# Altium PCB shayan_droudian.PcbDoc
Units mm, origin at the board's own origin, x right, y up, seen from the top; angles counter-clockwise.
Board outline 98.05 x 62.87 mm, 2 copper layers (Top Layer, Bottom Layer); 28 components, 23 nets, 116 pads, 8 vias.
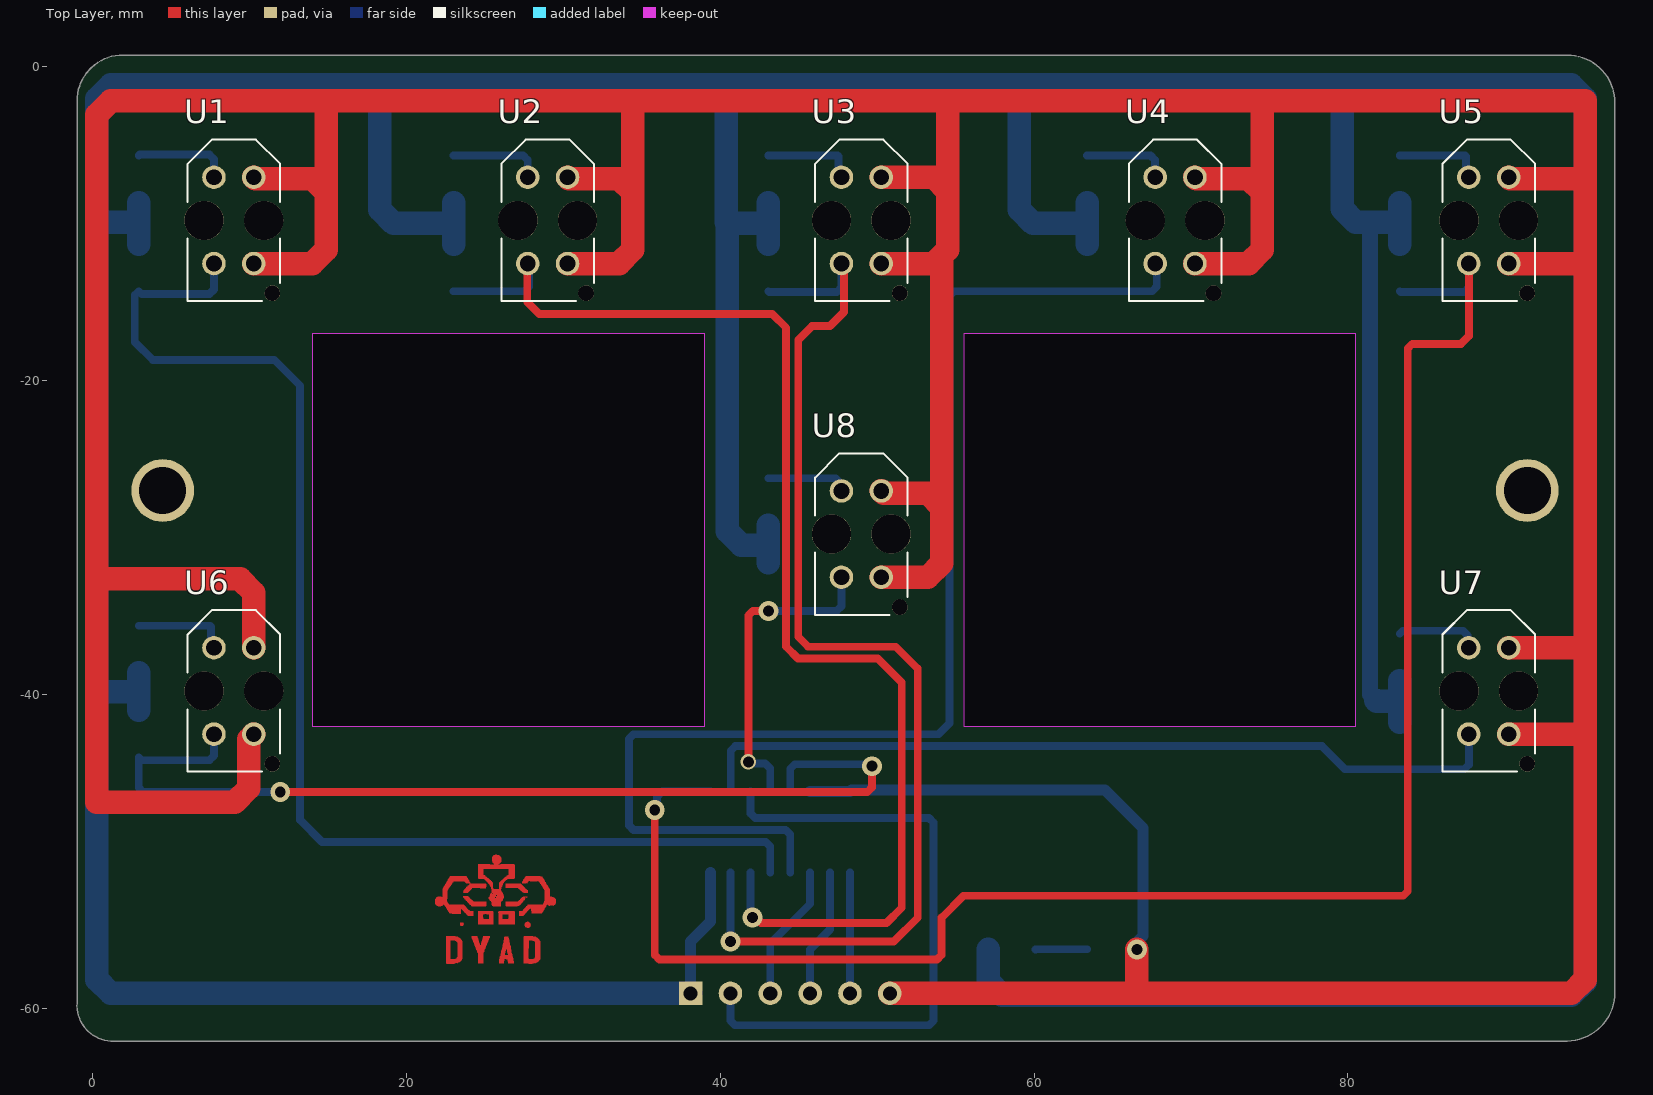
[diagram p0: Top Layer view]
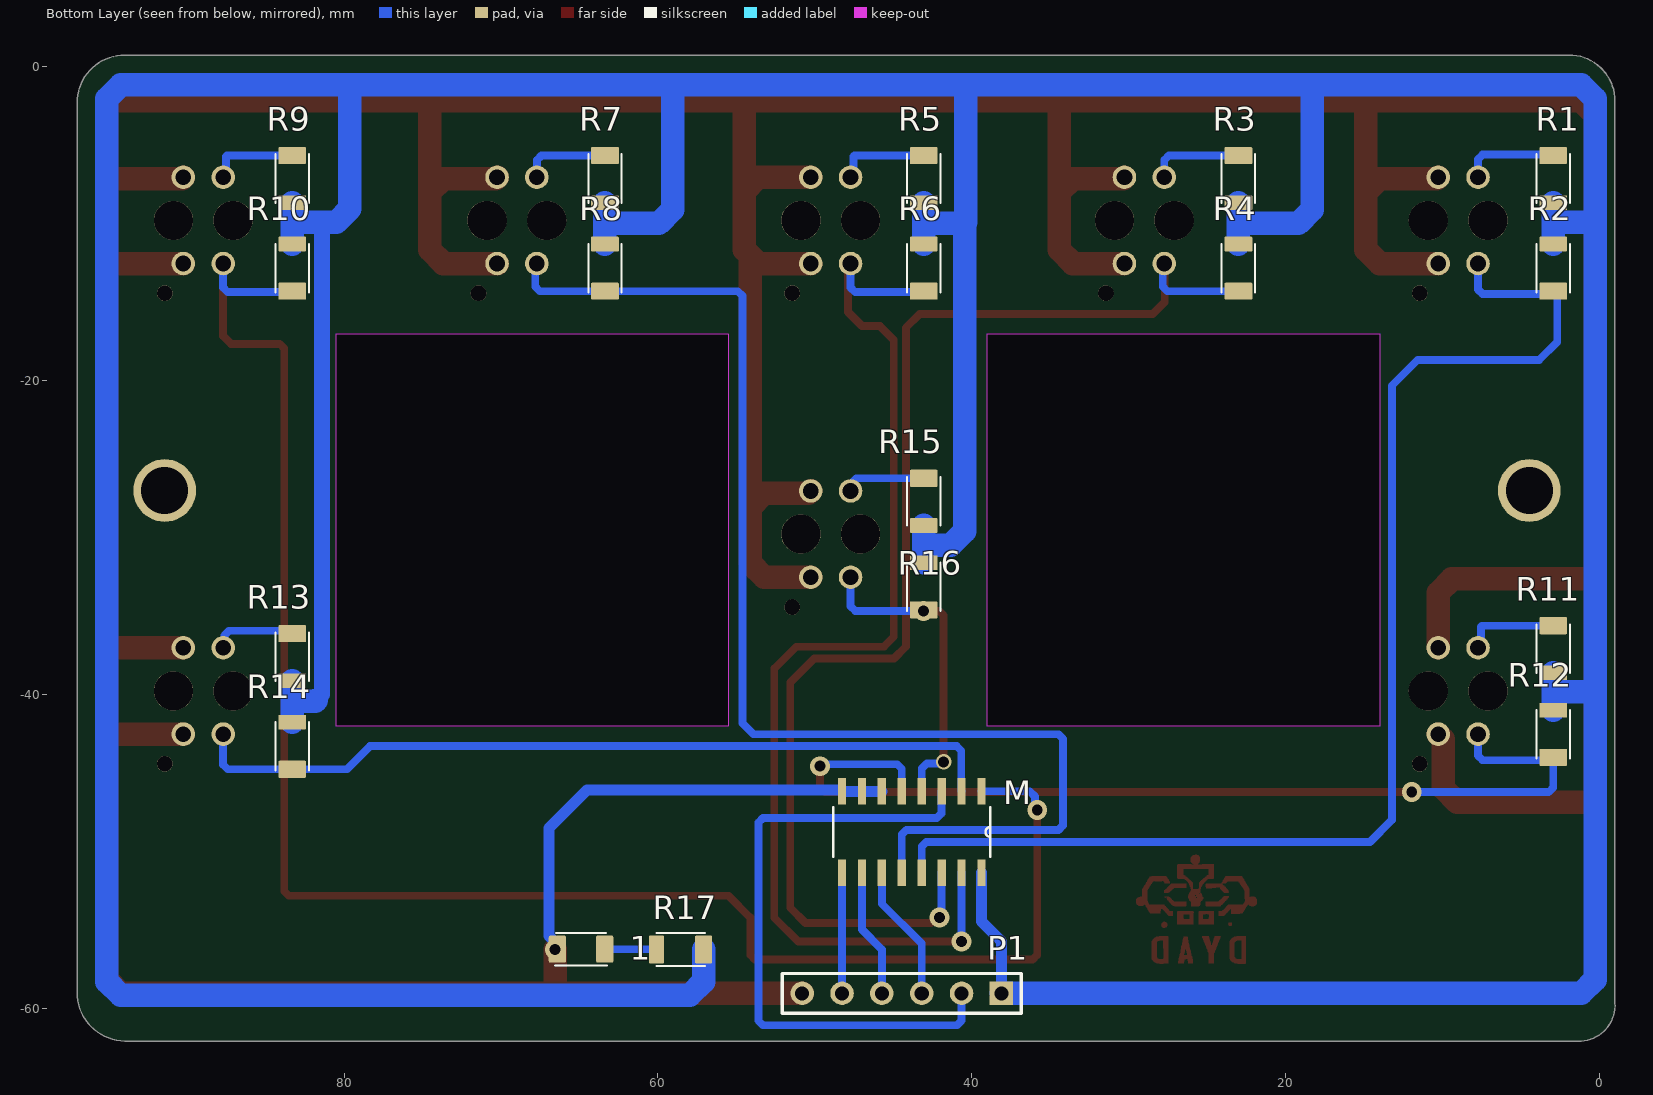
[diagram p1: Bottom Layer view, seen from below]
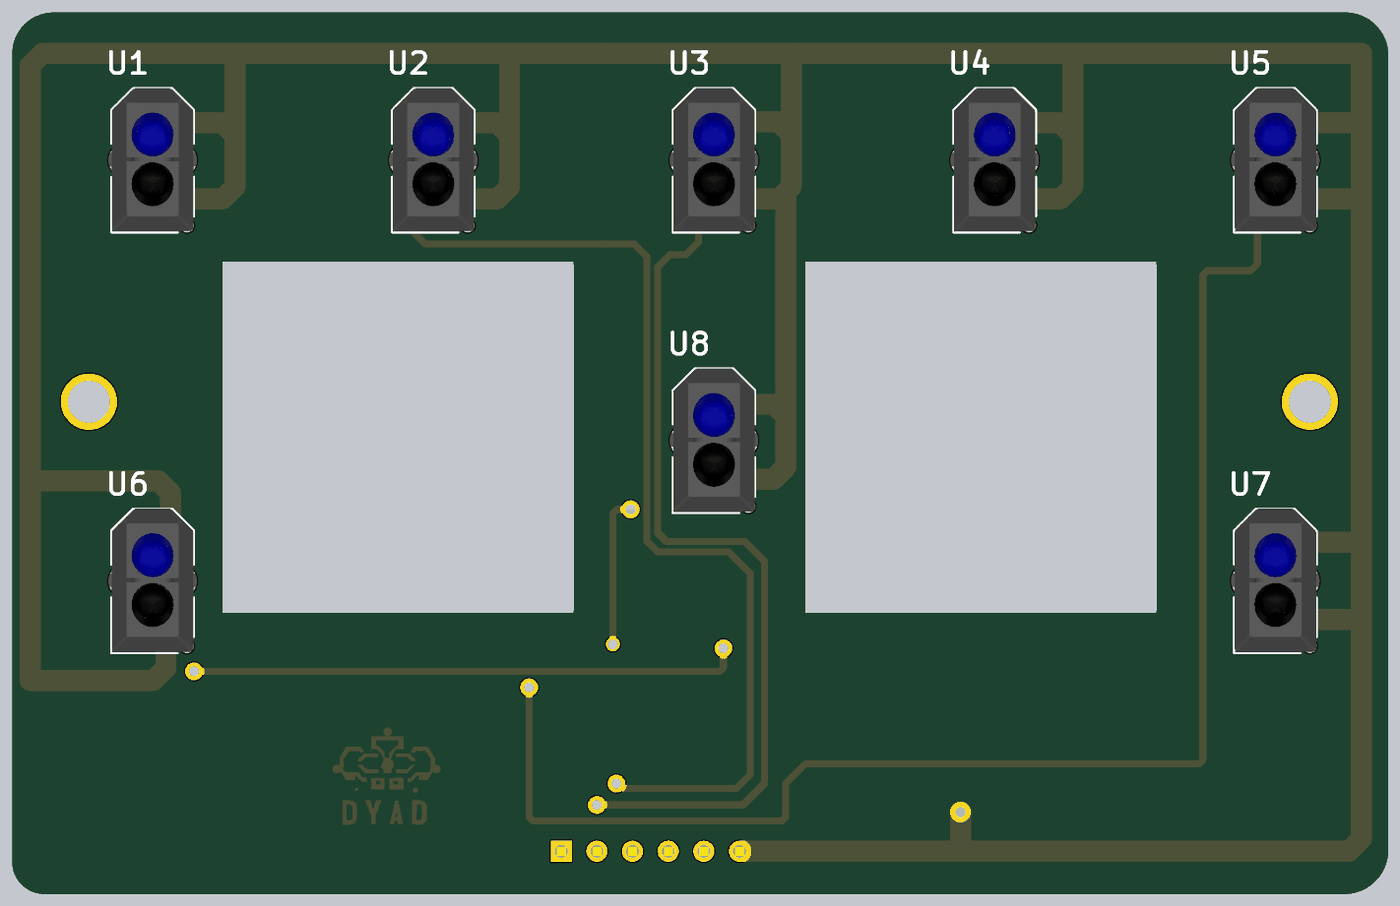
[diagram p2: 3D render of the assembled board from above, using the file's embedded part models]
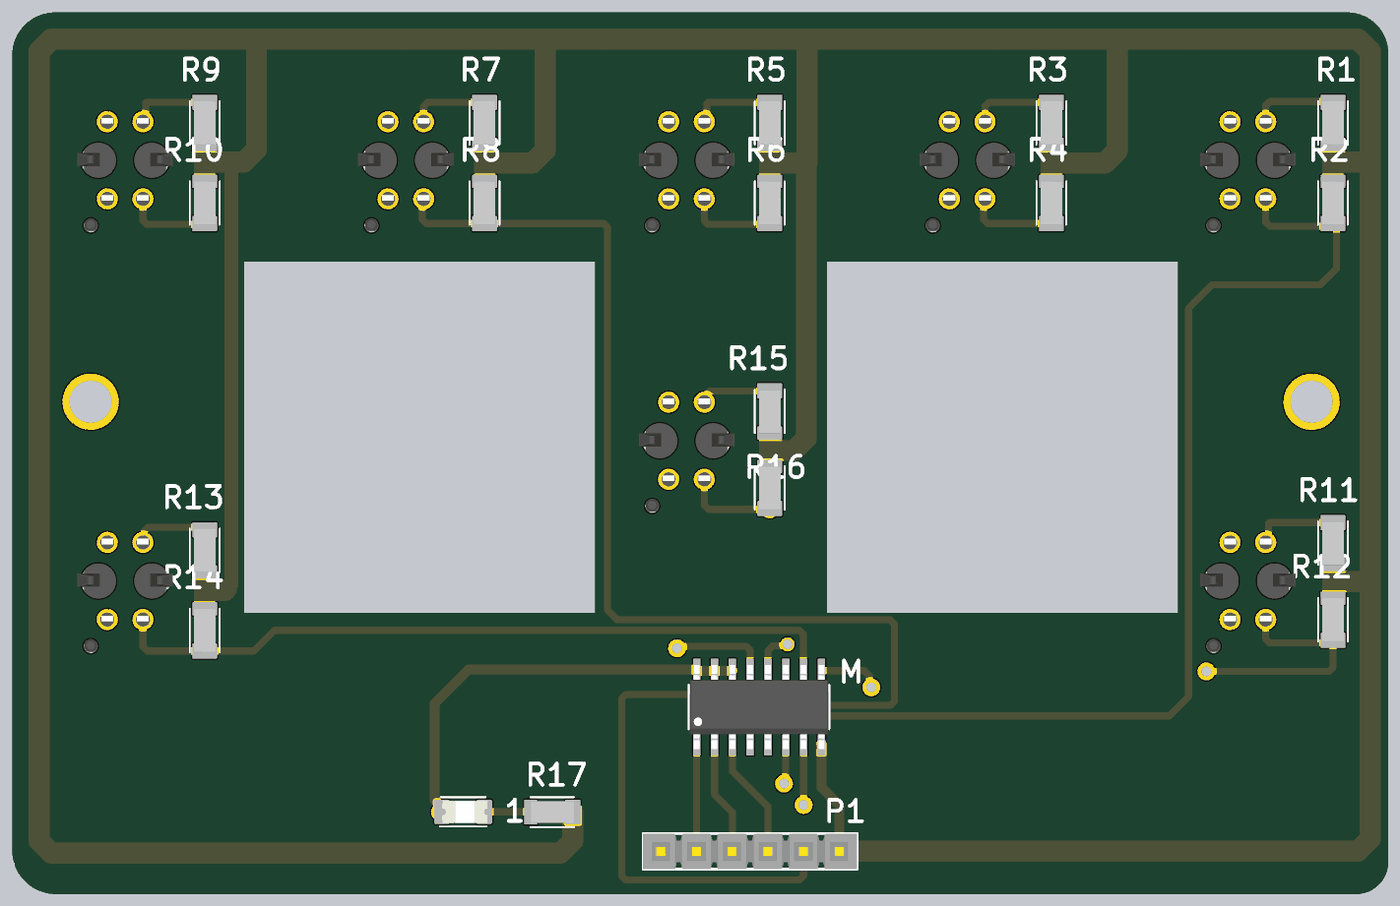
[diagram p3: 3D render of the assembled board from below, using the file's embedded part models]

## Layer stack, top to bottom
Top Solder: solder mask 0.0102, Solder Resist, Dk 3.5
Top Layer: signal copper 0.0356
Dielectric 1: dielectric 0.32, FR-4, Dk 4.8
Bottom Layer: signal copper 0.0356
Bottom Solder: solder mask 0.0102, Solder Resist, Dk 3.5

## Board outline
1.136,-62.103 cw(c1.27,-59.817) -1.016,-59.686 -1.016,-2.159 cw(c1.905,-2.159) 1.905,0.762 93.98,0.762 cw(c93.98,-2.286) 97.028,-2.286 97.028,-58.928 97.029,-58.991 cw(c93.917,-58.992) 93.983,-62.103 93.98,-62.103
cut-out: 38.989,-42.037 38.989,-17.018 13.97,-17.018 13.97,-42.037
cut-out: 55.499,-42.037 80.518,-42.037 80.518,-17.018 55.499,-17.018

## Design rules (kind name [scope] priority, off if disabled: settings)
Clearance [All] p1: gap=0.254 ignorepadtopadclearanceinfootprint=FALSE except(0: Arc-Hole Track-Hole SMDPad-Hole THPad-Hole Via-Hole Fill-Hole Poly-Hole Region-Hole Text-Hole)
PolygonConnect [All] p1: connectstyle=Relief reliefconductorwidth=0.254 reliefentries=4 polygonreliefangle="90 Angle" airgapwidth=0.254
RoutingVias [All] p1: holewidth=0.711 width=1.27 viastyle="Through Hole" minholewidth=0.711 minwidth=1.27 maxholewidth=0.711 maxwidth=1.27
SolderMaskExpansion [All] p1: expansion=0.102 istentingtop=FALSE
Width [All] p1: maxlimit=2 minlimit=0.5 preferedwidth=1 minimp=50.000000 maximp=50.000000 favimp=50.000000
30 further rules are at their usual default settings.

## Components (designator, comment, footprint, x,y, rotation, side; value= is the part's Value field where it differs from the comment)
1 "LTST-C230KFKT" LEDC3216X110 64.897,-56.241 r180 bottom
M "74HC4051D" SOIC127P600X175-16N 43.815,-48.768 r270 bottom
P1 "Header 6" HDR1X6 38.1,-59.055 r0 bottom
R1 "220" RESC3115X65N 2.921,-7.112 r270 bottom
R2 "2K" RESC3115X65N 2.921,-12.827 r90 bottom
R3 "220" RESC3115X65N 22.987,-7.112 r270 bottom
R4 "2K" RESC3115X65N 22.987,-12.827 r90 bottom
R5 "220" RESC3115X65N 43.053,-7.112 r270 bottom
R6 "2K" RESC3115X65N 43.053,-12.827 r90 bottom
R7 "220" RESC3115X65N 63.373,-7.112 r270 bottom
R8 "2K" RESC3115X65N 63.373,-12.827 r90 bottom
R9 "220" RESC3115X65N 83.312,-7.112 r270 bottom
R10 "2K" RESC3115X65N 83.312,-12.827 r90 bottom
R11 "220" RESC3115X65N 2.921,-37.084 r270 bottom
R12 "2K" RESC3115X65N 2.921,-42.545 r90 bottom
R13 "220" RESC3115X65N 83.312,-37.592 r270 bottom
R14 "2K" RESC3115X65N 83.312,-43.307 r90 bottom
R15 "220" RESC3115X65N 43.053,-27.686 r270 bottom
R16 "2K" RESC3115X65N 43.053,-33.147 r90 bottom
R17 "1879462-3" RESC3115X65N 58.547,-56.261 r0 bottom
U1 "IR_SENSOR" OPTO_TCRT5000 8.984,-9.779 r90 top
U2 "IR_SENSOR" OPTO_TCRT5000 28.984,-9.779 r90 top
U3 "IR_SENSOR" OPTO_TCRT5000 48.984,-9.779 r90 top
U4 "IR_SENSOR" OPTO_TCRT5000 68.984,-9.779 r90 top
U5 "IR_SENSOR" OPTO_TCRT5000 88.984,-9.779 r90 top
U6 "IR_SENSOR" OPTO_TCRT5000 8.984,-39.779 r90 top
U7 "IR_SENSOR" OPTO_TCRT5000 88.984,-39.779 r90 top
U8 "IR_SENSOR" OPTO_TCRT5000 48.984,-29.779 r90 top

## Footprints (in the part's own frame and the unit in brackets; to place one, negate y for a bottom-side part, rotate by r counter-clockwise, add the part's x,y. Pads: shape width x height; smd on the part's side, far side on the other; paste and mask are expansions set on the pad)
HDR1X6 [mm] "Connector; Header; 6 Position"
  rect 1.5x1.5 hole 0.9: 1(0,0)
  round 1.5 hole 0.9: 2(2.54,0) 3(5.08,0) 4(7.62,0) 5(10.16,0) 6(12.7,0)
  silkscreen extent -1.27,-1.27 13.97,1.27, body extent -1.26,-1.25 13.98,1.29, height 8.38
LEDC3216X110 [mm]
  rrect20% 1.1x1.73 smd: A(1.51,0) C(-1.51,0)
  silkscreen extent -1.65,-1.04 1.65,1.04, body extent -1.47,-0.8 1.73,0.8, height 1.13
OPTO_TCRT5000 [mm]
  round 1.5 hole 1: A(2.75,1.27) CATH(2.75,-1.27) COLL(-2.75,1.27) E(-2.75,-1.27)
  round 1 hole 1 unplated: ""(-4.65,-2.45)
  round 2.5 hole 2.5 unplated: ""(0,1.9) ""(0,-1.9)
  silkscreen extent -5.15,-2.95 5.15,2.95, body extent -5.04,-3.4 5.16,3.4, height 7.2
RESC3115X65N [mm]
  rrect14% 1.09x1.77 smd: 1(-1.465,0)
  rrect14% 0.94x1.77 smd: 2(1.54,0)
  silkscreen extent -1.55,-1.06 1.55,1.06, body extent -1.55,-0.77 1.55,0.77, height 0.53
SOIC127P600X175-16N [mil]
  rect 67x21 smd: 1(-102,175) 2(-102,125) 3(-102,75) 4(-102,25) 5(-102,-25) 6(-102,-75) 7(-102,-125) 8(-102,-175) 9(102,-175) 10(102,-125) 11(102,-75) 12(102,-25) 13(102,25) 14(102,75) 15(102,125) 16(102,175)
  silkscreen extent -62,-197 62,197, body extent -118,-195 118,195, height 67

## Part data
1: "Orange 605nm LED Indication - Discrete 2V 1206 (3216 Metric)", Package="1206 Lite-On", Availability=Unavailable, MF="Lite-On Inc.", MP=LTST-C230KFKT, Price=None, SnapEDA_Link=https://www.snapeda.com/parts/LTST-C230KFKT/Lite-On%20Inc./view-part/353318/?ref=snap
M: "1 Circuit IC Switch 8:1 130Ohm 16-SOIC", Package="SOIC-16 Toshiba", Availability="In Stock", Check_prices=https://www.snapeda.com/parts/74HC4051D/Toshiba/view-part/?ref=eda, MF=Toshiba, MP=74HC4051D, Price=None, Purchase-URL=https://pricing.snapeda.com/search/part/74HC4051D/?ref=eda, SnapEDA_Link=https://www.snapeda.com/parts/74HC4051D/Toshiba/view-part/?ref=snap
P1: "Header, 6-Pin", LatestRevisionDate=17-Jul-2002, LatestRevisionNote="Re-released for DXP Platform.", Publisher="Altium Limited"
R1 R2 R3 R4 R5 R6 R7 R8 R9 R10 R11 R12 R13 R14 R15 R16: library part 1879462-3, "RL73H 2B R12 1% 5K RL", Package=None, Availability=Unavailable, MP=1879462-3, Price=None
R17: "RL73H 2B R12 1% 5K RL", Package=None, Availability=Unavailable, MP=1879462-3, Price=None
U1 U2 U3 U4 U5 U6 U7 U8: library part TCRT5000, "950 nm 60 mA Through Hole Reflective Optical Sensor with Transistor Output", Package=None, Availability=Unavailable, MP=TCRT5000, Price=None

## Free pads (board coordinates)
  round 4 hole 3: 6(4.445,-27) 6(91.44,-27)

## Via types
v1: diameter 1.27, hole 0.7, Top Layer to Bottom Layer, 7 vias
v2: diameter 1, hole 0.7, Top Layer to Bottom Layer, 1 vias

## Nets (pads, with @x,y where several pads share a name; then routed paths per layer and width w, separated by ;. In a path a pad name is that pad's centre, name@x,y a point inside that pad or via, vN(x,y) a via of type N, cw(c..) or ccw(c..) an arc to the next point about the centre after c; other vN are vias at no path point)
+5: M.16 P1.1 R1.2 R2.2 R3.2 R4.2 R5.2 R6.2 R7.2 R8.2 R9.2 R10.2 R11.2 R12.2 R13.2 R14.2 R15.2 R16.2 R17.1 | length 424.9
  Bottom Layer w0.7: P1.1 38.1,-55.753 39.37,-54.483 M.16
  Bottom Layer w1: 81.407,-9.906 81.407,-40.005 81.788,-40.386
  Bottom Layer w1.5: R12.2 2.921,-39.814 ; R11.2 2.921,-39.814 ; R2.2 2.921,-9.97 ; R1.2 2.921,-9.97 ; R4.2 22.987,-9.97 ; R3.2 22.987,-9.97 ; P1.1 1.133,-59.055 0.254,-58.176 0.254,-39.878 ; 42.873,-30.48 41.328,-30.48 40.45,-29.601 40.45,-9.97 ; R16.2 R15.2 ; R6.2 43.053,-9.97 ; R5.2 43.053,-9.97 ; R17.1 57.082,-58.303 57.961,-59.182 94.244,-59.182 95.123,-58.303 95.123,-2.022 94.244,-1.143 79.629,-1.143 ; R8.2 63.373,-9.97 ; R7.2 63.373,-9.97 ; 81.788,-40.386 81.852,-40.45 83.312,-40.45 ; R14.2 83.312,-40.45 ; R13.2 83.312,-40.45 ; R10.2 83.312,-9.97 ; R9.2 83.312,-9.97 ; 0.254,-39.878 0.254,-9.906 ; 0.254,-39.878 0.318,-39.814 2.921,-39.814 ; 0.254,-9.906 0.254,-2.022 1.133,-1.143 18.288,-1.143 ; 0.254,-9.906 2.857,-9.906 2.921,-9.97 ; 18.288,-1.143 40.386,-1.143 ; 18.288,-1.143 18.288,-9.091 19.167,-9.97 22.987,-9.97 ; 40.386,-1.143 40.386,-9.906 40.45,-9.97 ; 40.386,-1.143 59.055,-1.143 ; 40.45,-9.97 43.053,-9.97 ; 59.055,-1.143 79.629,-1.143 ; 59.055,-1.143 59.055,-9.091 59.934,-9.97 63.373,-9.97 ; 79.629,-1.143 79.629,-9.027 80.508,-9.906 81.407,-9.906 83.248,-9.906 83.312,-9.97
A1: M.3 P1.2 | length 40.9
  Bottom Layer w0.5: P1.2 40.64,-60.794 40.933,-61.087 53.301,-61.087 53.594,-60.794 53.594,-48.172 53.301,-47.879 42.22,-47.879 41.927,-47.586 41.927,-46.194 M.3
D1: M.11 P1.3 | length 8.7
  Bottom Layer w0.5: P1.3 43.18,-55.88 45.72,-53.34 M.11
D2: M.10 P1.4 | length 8.2
  Bottom Layer w0.5: P1.4 45.72,-56.261 46.99,-54.991 M.10
D3: M.9 P1.5 | length 7.7
  Bottom Layer w0.5: P1.5 M.9
GND: 1.C M.6 M.7 M.8 P1.6 U1.CATH U1.E U2.CATH U2.E U3.CATH U3.E U4.CATH U4.E U5.CATH U5.E U6.CATH U6.E U7.CATH U7.E U8.CATH U8.E | length 423.8
  Top Layer w1.5: U6.E 9.93,-42.853 9.93,-45.984 9.051,-46.863 0.254,-46.863 0.254,-32.512 ; U6.CATH 10.254,-33.518 9.375,-32.639 0.381,-32.639 0.254,-32.512 ; U1.E 13.98,-12.529 14.859,-11.65 14.859,-7.991 ; U1.CATH 10.337,-7.112 13.98,-7.112 14.859,-7.991 ; U2.E 33.538,-12.529 34.417,-11.65 34.417,-7.991 ; U2.CATH 30.337,-7.112 33.538,-7.112 34.417,-7.991 ; U8.E 53.223,-32.529 54.102,-31.65 54.102,-28.057 ; U8.CATH 50.403,-27.178 53.223,-27.178 54.102,-28.057 ; U3.E 53.604,-12.529 54.483,-11.65 54.483,-7.908 ; U3.CATH 53.604,-7.029 54.483,-7.908 ; P1.6 66.548,-59.055 ; 54.102,-12.031 54.102,-28.057 ; v1(66.548,-56.261) 66.548,-59.055 ; U4.E 73.67,-12.529 74.549,-11.65 74.549,-7.991 ; U4.CATH 70.337,-7.112 73.67,-7.112 74.549,-7.991 ; U7.E 94.98,-42.529 95.123,-42.672 ; U7.CATH 95.068,-37.029 95.123,-37.084 ; U5.E 95.079,-12.529 95.123,-12.573 ; U5.CATH 90.337,-7.112 95.123,-7.112 ; 0.254,-32.512 0.254,-3.038 1.133,-2.159 14.605,-2.159 ; 14.605,-2.159 34.417,-2.159 ; 14.605,-2.159 14.859,-2.413 14.859,-7.991 ; 34.417,-7.991 34.417,-2.159 ; 34.417,-2.159 54.483,-2.159 ; 54.483,-7.908 54.483,-2.159 ; 54.483,-2.159 74.549,-2.159 ; 66.548,-59.055 94.244,-59.055 95.123,-58.176 95.123,-42.672 ; 74.549,-7.991 74.549,-2.159 ; 74.549,-2.159 95.123,-2.159 95.123,-7.112 ; 95.123,-42.672 95.123,-37.084 ; 95.123,-37.084 95.123,-12.573 ; 95.123,-12.573 95.123,-7.112
  Bottom Layer w0.7: M.6 M.7 M.8 48.343,-46.094 64.509,-46.094 66.929,-48.514 66.929,-55.404 66.548,-55.785 v1(66.548,-56.261) 1.C@66.421,-56.134
Net1_A: 1.A R17.2 | length 3.3
  Bottom Layer w0.5: R17.2 60.107,-56.241 1.A
NetR1_1: R1.1 U1.A | length 6.1
  Bottom Layer w0.5: R1.1 2.98,-5.588 7.421,-5.588 7.714,-5.881 U1.A
NetR3_1: R3.1 U2.A | length 5.9
  Bottom Layer w0.5: R3.1 27.421,-5.647 27.714,-5.94 U2.A
NetR5_1: R5.1 U3.A | length 5.9
  Bottom Layer w0.5: R5.1 47.459,-5.647 47.523,-5.711 47.523,-6.838 U3.A
NetR7_1: R7.1 U4.A | length 5.6
  Bottom Layer w0.5: R7.1 67.421,-5.647 67.714,-5.94 U4.A
NetR9_1: R9.1 U5.A | length 5.6
  Bottom Layer w0.5: R9.1 87.464,-5.647 87.523,-5.706 87.523,-6.838 U5.A
NetR11_1: R11.1 U6.A | length 6.1
  Bottom Layer w0.5: R11.1 7.454,-35.619 7.523,-35.688 7.523,-36.838 U6.A
NetR13_1: R13.1 U7.A | length 5.3
  Bottom Layer w0.5: R13.1 83.498,-35.941 87.337,-35.941 87.63,-36.234 87.63,-36.945 U7.A
NetR15_1: R15.1 U8.A | length 5.2
  Bottom Layer w0.5: R15.1 47.332,-26.221 47.625,-26.514 47.625,-26.94 U8.A
S1: M.13 R2.1 U1.COLL | length 81.7
  Bottom Layer w0.5: U1.COLL 7.714,-14.185 7.421,-14.478 3.107,-14.478 R2.1 2.667,-14.546 2.667,-17.526 3.81,-18.669 11.557,-18.669 13.208,-20.32 13.208,-48.006 14.605,-49.403 42.887,-49.403 43.18,-49.696 M.13
S2: M.14 R4.1 U2.COLL | length 82.1
  Top Layer w0.5: U2.COLL 27.686,-12.557 27.686,-14.986 28.448,-15.748 43.307,-15.748 44.192,-16.633 44.192,-36.953 44.95,-37.711 50.03,-37.711 51.562,-39.243 51.562,-53.594 50.59,-54.566 42.583,-54.566 42.245,-54.229 v1(42.037,-54.229)
  Bottom Layer w0.5: R4.1 27.52,-14.292 27.813,-13.999 27.813,-12.628 U2.COLL ; M.14 41.927,-51.376 41.927,-54.119 v1(42.037,-54.229)
S3: M.15 R6.1 U3.COLL | length 73.4
  Top Layer w0.5: v1(40.64,-55.753) 51.054,-55.753 52.578,-54.229 52.578,-38.354 51.181,-36.957 45.593,-36.957 44.958,-36.322 44.958,-17.399 45.847,-16.51 46.99,-16.51 47.879,-15.621 47.879,-12.694 U3.COLL
  Bottom Layer w0.5: v1(40.64,-55.753) M.15 ; R6.1 43.112,-14.351 47.421,-14.351 47.714,-14.058 U3.COLL
S4: M.12 R8.1 U4.COLL | length 81.5
  Bottom Layer w0.5: M.12 44.45,-48.934 44.157,-48.641 34.464,-48.641 34.171,-48.348 34.171,-42.834 34.464,-42.541 53.909,-42.541 54.61,-41.84 54.61,-14.585 54.903,-14.292 R8.1 67.525,-14.292 67.818,-13.999 67.818,-12.633 U4.COLL
S5: M.1 R10.1 U5.COLL | length 114.5
  Top Layer w0.5: v1(35.814,-47.367) 35.814,-56.603 36.107,-56.896 53.809,-56.896 54.102,-56.603 54.102,-54.229 55.499,-52.832 83.527,-52.832 83.82,-52.539 83.82,-17.946 84.113,-17.653 87.21,-17.653 87.714,-17.149 U5.COLL
  Bottom Layer w0.5: v1(35.814,-47.367) 35.961,-47.22 35.961,-46.508 36.292,-46.177 M.1 ; R10.1 83.371,-14.351 87.421,-14.351 87.714,-14.058 U5.COLL
S6: M.5 R12.1 U6.COLL | length 63.4
  Top Layer w0.5: v1(11.938,-46.228) 49.364,-46.228 49.657,-45.935 v1(49.657,-44.577)
  Bottom Layer w0.5: U6.COLL 7.714,-43.903 7.421,-44.196 3.107,-44.196 R12.1 2.921,-45.935 3.214,-46.228 v1(11.938,-46.228) ; M.5 44.45,-44.743 44.743,-44.45 49.53,-44.45 v1(49.657,-44.577)
S7: M.2 R14.1 U7.COLL | length 52.5
  Bottom Layer w0.5: M.2 40.657,-46.16 40.657,-43.588 40.95,-43.295 78.347,-43.295 79.824,-44.772 R14.1 87.421,-44.772 87.714,-44.479 U7.COLL
S8: M.4 R16.1 U8.COLL | length 20.4
  Top Layer w0.5: v2(41.783,-44.299) 41.783,-34.964 42.076,-34.671 v1(43.053,-34.671)
  Bottom Layer w0.5: v2(41.783,-44.299) 41.879,-44.395 42.848,-44.395 43.18,-44.727 M.4 ; v1(43.053,-34.671) 47.421,-34.671 47.714,-34.378 U8.COLL
pads on no net: U1. U2. U3. U4. U5. U6. U7. U8.

## Other copper
Top Layer:
  region: 25.303,-52.703 25.322,-52.703 25.322,-52.723 25.303,-52.723
  region: 25.342,-52.703 25.361,-52.703 25.361,-52.742 25.342,-52.742 25.342,-52.723
  region: 23.091,-55.439 23.188,-55.439 23.188,-55.458 23.246,-55.458 23.246,-55.478 23.285,-55.478 23.285,-55.497 23.324,-55.497 23.324,-55.517 23.343,-55.517 23.343,-55.536 23.363,-55.536 23.363,-55.555 23.402,-55.555 23.402,-55.575 23.421,-55.575 23.421,-55.594 23.44,-55.594 23.44,-55.614 23.46,-55.614 23.46,-55.652 23.479,-55.652 23.479,-55.672 23.499,-55.672 23.499,-55.711 23.518,-55.711 23.518,-55.749 23.537,-55.749 23.537,-55.788 23.557,-55.788 23.557,-56.797 23.537,-56.797 23.537,-56.836 23.518,-56.836 23.518,-56.894 23.499,-56.894 23.499,-56.933 23.479,-56.933 23.479,-56.952 23.46,-56.952 23.46,-56.972 23.44,-56.972 23.44,-56.991 23.421,-56.991 23.421,-57.011 23.402,-57.011 23.402,-57.03 23.382,-57.03 23.382,-57.049 23.343,-57.049 23.343,-57.069 23.304,-57.069 23.304,-57.088 23.266,-57.088 23.266,-57.108 23.207,-57.108 23.207,-57.127 23.11,-57.127 23.11,-57.146 23.033,-57.146 23.033,-57.166 22.548,-57.166 22.548,-57.146 22.509,-57.146 22.509,-55.42 23.091,-55.42 hole: 23.052,-55.711 22.819,-55.711 22.819,-56.836 22.839,-56.836 22.839,-56.855 23.013,-56.855 23.013,-56.836 23.11,-56.836 23.11,-56.817 23.149,-56.817 23.149,-56.797 23.169,-56.797 23.169,-56.758 23.188,-56.758 23.188,-56.72 23.207,-56.72 23.207,-55.846 23.188,-55.846 23.188,-55.808 23.169,-55.808 23.169,-55.769 23.13,-55.769 23.13,-55.749 23.11,-55.749 23.11,-55.73 23.052,-55.73
  region: 23.421,-54.702 23.402,-54.702 23.402,-54.605 23.421,-54.605 23.421,-54.566 23.44,-54.566 23.44,-54.546 23.576,-54.546 23.576,-54.566 23.615,-54.566 23.615,-54.624 23.634,-54.624 23.634,-54.644 23.615,-54.644 23.615,-54.702 23.596,-54.702 23.596,-54.721 23.576,-54.721 23.576,-54.741 23.557,-54.741 23.557,-54.76 23.479,-54.76 23.479,-54.741 23.44,-54.741 23.44,-54.721 23.421,-54.721
  region: 27.787,-54.857 27.767,-54.857 27.767,-54.876 27.67,-54.876 27.67,-54.857 27.612,-54.857 27.612,-54.838 27.593,-54.838 27.593,-54.818 27.573,-54.818 27.573,-54.799 27.554,-54.799 27.554,-54.741 27.534,-54.741 27.534,-54.605 27.554,-54.605 27.554,-54.566 27.573,-54.566 27.573,-54.546 27.612,-54.546 27.612,-54.527 27.67,-54.527 27.67,-54.508 27.748,-54.508 27.748,-54.527 27.787,-54.527 27.787,-54.546 27.845,-54.546 27.845,-54.585 27.864,-54.585 27.864,-54.605 27.884,-54.605 27.884,-54.682 27.903,-54.682 27.903,-54.721 27.884,-54.721 27.884,-54.799 27.864,-54.799 27.864,-54.818 27.845,-54.818 27.845,-54.838 27.825,-54.838 27.825,-54.857 27.806,-54.857
  region: 26.758,-53.829 26.855,-53.829 26.855,-53.848 26.875,-53.848 26.875,-54.644 25.866,-54.644 25.866,-54.139 25.866,-54.12 25.866,-53.906 25.846,-53.906 25.846,-53.887 25.866,-53.887 25.866,-53.829 26.215,-53.829 26.215,-53.809 26.758,-53.809 hole: 26.448,-54.042 26.118,-54.042 26.118,-54.275 26.137,-54.275 26.137,-54.294 26.448,-54.294 26.448,-54.275 26.487,-54.275 26.487,-54.12 26.467,-54.12 26.467,-54.061 26.448,-54.061
  region: 24.779,-53.499 24.139,-53.499 24.139,-53.479 24.119,-53.479 24.119,-53.441 24.1,-53.441 24.1,-53.421 24.081,-53.421 24.081,-53.402 24.061,-53.402 24.061,-53.382 24.042,-53.382 24.042,-53.363 24.003,-53.363 24.003,-53.324 23.984,-53.324 23.984,-53.305 23.964,-53.305 23.964,-53.285 23.945,-53.285 23.945,-53.266 23.925,-53.266 23.925,-53.247 23.906,-53.247 23.906,-53.227 23.887,-53.227 23.887,-53.208 23.867,-53.208 23.867,-53.188 23.848,-53.188 23.848,-53.169 23.828,-53.169 23.828,-53.149 23.809,-53.149 23.809,-53.13 23.79,-53.13 23.79,-53.111 23.77,-53.111 23.77,-53.091 23.751,-53.091 23.751,-53.052 23.712,-53.052 23.712,-53.014 23.693,-53.014 23.693,-52.994 23.673,-52.994 23.673,-52.975 23.654,-52.975 23.654,-52.955 23.634,-52.955 23.634,-52.917 23.615,-52.917 23.615,-52.878 23.906,-52.878 23.906,-52.897 23.945,-52.897 23.945,-52.936 23.984,-52.936 23.984,-52.955 24.003,-52.955 24.003,-52.994 24.022,-52.994 24.022,-53.014 24.042,-53.014 24.042,-53.033 24.061,-53.033 24.061,-53.052 24.081,-53.052 24.081,-53.072 24.1,-53.072 24.1,-53.091 24.119,-53.091 24.119,-53.111 24.158,-53.111 24.158,-53.13 24.178,-53.13 24.178,-53.149 24.197,-53.149 24.197,-53.169 24.216,-53.169 24.216,-53.188 24.236,-53.188 24.236,-53.208 25.051,-53.208 25.051,-53.227 25.07,-53.227 25.07,-53.479 25.051,-53.479 25.051,-53.499 24.799,-53.499
  region: 27.185,-52.082 27.282,-52.082 27.282,-52.102 27.301,-52.102 27.301,-52.121 27.321,-52.121 27.321,-52.141 27.34,-52.141 27.34,-52.16 27.36,-52.16 27.36,-52.179 27.379,-52.179 27.379,-52.199 27.398,-52.199 27.398,-52.218 27.418,-52.218 27.418,-52.238 27.437,-52.238 27.437,-52.276 27.476,-52.276 27.476,-52.296 27.495,-52.296 27.495,-52.315 27.515,-52.315 27.515,-52.335 27.534,-52.335 27.534,-52.354 27.554,-52.354 27.554,-52.373 27.573,-52.373 27.573,-52.412 27.612,-52.412 27.612,-52.432 27.631,-52.432 27.631,-52.451 27.651,-52.451 27.651,-52.47 27.67,-52.47 27.67,-52.49 27.709,-52.49 27.709,-52.509 27.728,-52.509 27.728,-52.626 27.709,-52.626 27.709,-52.645 27.476,-52.645 27.476,-52.626 27.437,-52.626 27.437,-52.606 27.398,-52.606 27.398,-52.587 27.379,-52.587 27.379,-52.567 27.36,-52.567 27.36,-52.548 27.34,-52.548 27.34,-52.529 27.321,-52.529 27.321,-52.509 27.301,-52.509 27.301,-52.49 27.282,-52.49 27.282,-52.47 27.243,-52.47 27.243,-52.451 27.224,-52.451 27.224,-52.432 27.204,-52.432 27.204,-52.412 27.185,-52.412 27.185,-52.393 27.166,-52.393 27.166,-52.373 27.146,-52.373 27.146,-52.354 27.127,-52.354 27.127,-52.335 26.312,-52.335 26.312,-52.082 27.166,-52.082
  region: 24.934,-53.829 25.478,-53.829 25.478,-53.848 25.516,-53.848 25.516,-54.023 25.516,-54.042 25.516,-54.644 24.566,-54.644 24.566,-53.829 24.837,-53.829 24.837,-53.809 24.857,-53.809 24.857,-53.829 24.896,-53.829 24.896,-53.809 24.934,-53.809 hole: 25.07,-54.023 24.973,-54.023 24.973,-54.042 24.915,-54.042 24.915,-54.061 24.896,-54.061 24.896,-54.217 24.915,-54.217 24.915,-54.294 25.225,-54.294 25.225,-54.042 25.07,-54.042
  region: 26.467,-55.458 26.487,-55.458 26.487,-55.555 26.506,-55.555 26.506,-55.652 26.525,-55.652 26.525,-55.749 26.545,-55.749 26.545,-55.846 26.564,-55.846 26.564,-55.924 26.584,-55.924 26.584,-55.982 26.603,-55.982 26.603,-56.041 26.603,-56.06 26.622,-56.06 26.622,-56.176 26.642,-56.176 26.642,-56.293 26.661,-56.293 26.661,-56.39 26.681,-56.39 26.681,-56.487 26.7,-56.487 26.7,-56.564 26.719,-56.564 26.719,-56.623 26.739,-56.623 26.739,-56.72 26.758,-56.72 26.758,-56.817 26.778,-56.817 26.778,-56.914 26.797,-56.914 26.797,-57.011 26.816,-57.011 26.816,-57.146 26.506,-57.146 26.506,-57.127 26.487,-57.127 26.487,-57.049 26.467,-57.049 26.467,-57.011 26.448,-57.011 26.448,-56.894 26.428,-56.894 26.428,-56.875 26.351,-56.875 26.351,-56.855 26.234,-56.855 26.234,-56.875 26.215,-56.875 26.215,-56.972 26.196,-56.972 26.196,-57.069 26.176,-57.069 26.176,-57.127 26.157,-57.127 26.157,-57.146 25.904,-57.146 25.904,-57.127 25.885,-57.127 25.885,-56.991 25.904,-56.991 25.904,-56.894 25.924,-56.894 25.924,-56.817 25.943,-56.817 25.943,-56.739 25.963,-56.739 25.963,-56.7 25.982,-56.7 25.982,-56.623 26.001,-56.623 26.001,-56.526 26.021,-56.526 26.021,-56.429 26.04,-56.429 26.04,-56.351 26.06,-56.351 26.06,-56.273 26.079,-56.273 26.079,-56.215 26.098,-56.215 26.098,-56.138 26.118,-56.138 26.118,-56.041 26.137,-56.041 26.137,-55.963 26.157,-55.963 26.157,-55.866 26.176,-55.866 26.176,-55.769 26.196,-55.769 26.196,-55.672 26.215,-55.672 26.215,-55.614 26.234,-55.614 26.234,-55.478 26.254,-55.478 26.254,-55.439 26.467,-55.439 hole: 26.37,-56.293 26.351,-56.293 26.351,-56.332 26.331,-56.332 26.331,-56.37 26.312,-56.37 26.312,-56.429 26.312,-56.448 26.312,-56.506 26.293,-56.506 26.293,-56.603 26.37,-56.603 26.37,-56.584 26.428,-56.584 26.428,-56.564 26.409,-56.564 26.409,-56.467 26.39,-56.467 26.39,-56.39 26.37,-56.39
  region: 27.67,-52.917 27.651,-52.917 27.651,-52.936 27.631,-52.936 27.631,-52.955 27.612,-52.955 27.612,-52.975 27.573,-52.975 27.573,-52.994 27.534,-52.994 27.534,-53.014 27.515,-53.014 27.515,-52.994 27.495,-52.994 27.495,-53.014 27.515,-53.014 27.515,-53.033 27.534,-53.033 27.534,-53.052 27.515,-53.052 27.515,-53.091 27.495,-53.091 27.495,-53.111 27.476,-53.111 27.476,-53.13 27.437,-53.13 27.437,-53.169 27.418,-53.169 27.418,-53.188 27.398,-53.188 27.398,-53.208 27.379,-53.208 27.379,-53.227 27.36,-53.227 27.36,-53.266 27.34,-53.266 27.34,-53.285 27.321,-53.285 27.321,-53.305 27.301,-53.305 27.301,-53.324 27.282,-53.324 27.282,-53.344 27.263,-53.344 27.263,-53.363 27.243,-53.363 27.243,-53.382 27.224,-53.382 27.224,-53.402 27.204,-53.402 27.204,-53.421 27.185,-53.421 27.185,-53.441 27.166,-53.441 27.166,-53.46 27.146,-53.46 27.146,-53.479 27.049,-53.479 27.049,-53.499 26.351,-53.499 26.351,-53.479 26.331,-53.479 26.331,-53.46 26.312,-53.46 26.312,-53.208 27.127,-53.208 27.127,-53.188 27.146,-53.188 27.146,-53.169 27.166,-53.169 27.166,-53.149 27.185,-53.149 27.185,-53.13 27.204,-53.13 27.204,-53.111 27.224,-53.111 27.224,-53.091 27.243,-53.091 27.243,-53.072 27.263,-53.072 27.263,-53.052 27.282,-53.052 27.282,-53.014 27.301,-53.014 27.301,-52.994 27.321,-52.994 27.321,-52.975 27.34,-52.975 27.34,-52.955 27.36,-52.955 27.36,-52.936 27.379,-52.936 27.379,-52.917 27.418,-52.917 27.418,-52.936 27.437,-52.936 27.437,-52.897 27.67,-52.897 hole: 27.515,-52.917 27.495,-52.917 27.495,-52.936 27.515,-52.936 hole: 27.612,-52.917 27.593,-52.917 27.593,-52.936 27.612,-52.936 hole: 27.573,-52.936 27.554,-52.936 27.554,-52.955 27.573,-52.955
  region: 24.76,-55.885 24.76,-55.846 24.779,-55.846 24.779,-55.808 24.799,-55.808 24.799,-55.73 24.818,-55.73 24.818,-55.652 24.837,-55.652 24.837,-55.594 24.857,-55.594 24.857,-55.517 24.876,-55.517 24.876,-55.439 24.896,-55.439 24.896,-55.42 25.303,-55.42 25.303,-55.478 25.284,-55.478 25.284,-55.497 25.264,-55.497 25.264,-55.555 25.245,-55.555 25.245,-55.594 25.225,-55.594 25.225,-55.633 25.206,-55.633 25.206,-55.672 25.187,-55.672 25.187,-55.73 25.167,-55.73 25.167,-55.788 25.148,-55.788 25.148,-55.808 25.128,-55.808 25.128,-55.866 25.109,-55.866 25.109,-55.924 25.09,-55.924 25.09,-55.963 25.07,-55.963 25.07,-56.021 25.051,-56.021 25.051,-56.079 25.031,-56.079 25.031,-56.118 25.012,-56.118 25.012,-56.157 24.993,-56.157 24.993,-56.215 24.973,-56.215 24.973,-56.254 24.954,-56.254 24.954,-56.312 24.934,-56.312 24.934,-56.39 24.915,-56.39 24.915,-56.448 24.896,-56.448 24.896,-56.467 24.876,-56.467 24.876,-57.146 24.566,-57.146 24.566,-57.127 24.546,-57.127 24.546,-56.467 24.527,-56.467 24.527,-56.429 24.507,-56.429 24.507,-56.351 24.488,-56.351 24.488,-56.312 24.469,-56.312 24.469,-56.273 24.449,-56.273 24.449,-56.235 24.43,-56.235 24.43,-56.176 24.41,-56.176 24.41,-56.118 24.391,-56.118 24.391,-56.079 24.372,-56.079 24.372,-56.021 24.352,-56.021 24.352,-55.963 24.333,-55.963 24.333,-55.924 24.313,-55.924 24.313,-55.885 24.294,-55.885 24.294,-55.827 24.275,-55.827 24.275,-55.769 24.255,-55.769 24.255,-55.73 24.236,-55.73 24.236,-55.672 24.216,-55.672 24.216,-55.652 24.197,-55.652 24.197,-55.594 24.178,-55.594 24.178,-55.555 24.158,-55.555 24.158,-55.497 24.139,-55.497 24.139,-55.458 24.119,-55.458 24.119,-55.439 24.139,-55.439 24.139,-55.42 24.488,-55.42 24.488,-55.458 24.507,-55.458 24.507,-55.517 24.527,-55.517 24.527,-55.575 24.546,-55.575 24.546,-55.652 24.566,-55.652 24.566,-55.711 24.585,-55.711 24.585,-55.769 24.604,-55.769 24.604,-55.846 24.624,-55.846 24.624,-55.905 24.643,-55.905 24.643,-55.963 24.663,-55.963 24.663,-56.002 24.682,-56.002 24.682,-56.099 24.701,-56.099 24.701,-56.06 24.721,-56.06 24.721,-55.982 24.74,-55.982 24.74,-55.924 24.76,-55.924 24.76,-55.905
  region: 325 vertices and 0 holes, not listed, extent 21.81,-54.12 24.236,-51.597
  region: 24.43,-52.335 24.158,-52.335 24.158,-52.373 24.139,-52.373 24.139,-52.393 24.119,-52.393 24.119,-52.412 24.1,-52.412 24.1,-52.432 24.081,-52.432 24.081,-52.451 24.061,-52.451 24.061,-52.47 24.042,-52.47 24.042,-52.49 24.022,-52.49 24.022,-52.509 24.003,-52.509 24.003,-52.529 23.984,-52.529 23.984,-52.548 23.964,-52.548 23.964,-52.567 23.945,-52.567 23.945,-52.587 23.925,-52.587 23.925,-52.606 23.906,-52.606 23.906,-52.626 23.887,-52.626 23.887,-52.645 23.634,-52.645 23.634,-52.606 23.615,-52.606 23.615,-52.567 23.634,-52.567 23.634,-52.47 23.673,-52.47 23.673,-52.451 23.693,-52.451 23.693,-52.432 23.712,-52.432 23.712,-52.412 23.731,-52.412 23.731,-52.393 23.751,-52.393 23.751,-52.373 23.77,-52.373 23.77,-52.354 23.79,-52.354 23.79,-52.335 23.809,-52.335 23.809,-52.296 23.828,-52.296 23.828,-52.276 23.867,-52.276 23.867,-52.257 23.887,-52.257 23.887,-52.218 23.906,-52.218 23.906,-52.199 23.945,-52.199 23.945,-52.179 23.964,-52.179 23.964,-52.16 23.984,-52.16 23.984,-52.141 24.003,-52.141 24.003,-52.121 24.022,-52.121 24.022,-52.082 25.051,-52.082 25.051,-52.102 25.07,-52.102 25.07,-52.257 25.051,-52.257 25.051,-52.335 25.031,-52.335 25.031,-52.354 24.701,-52.354 24.701,-52.335 24.449,-52.335
  region: 28.039,-55.439 28.136,-55.439 28.136,-55.458 28.213,-55.458 28.213,-55.478 28.252,-55.478 28.252,-55.497 28.291,-55.497 28.291,-55.517 28.31,-55.517 28.31,-55.536 28.349,-55.536 28.349,-55.555 28.369,-55.555 28.369,-55.575 28.388,-55.575 28.388,-55.594 28.407,-55.594 28.407,-55.614 28.427,-55.614 28.427,-55.652 28.446,-55.652 28.446,-55.672 28.466,-55.672 28.466,-55.691 28.485,-55.691 28.485,-55.749 28.504,-55.749 28.504,-55.846 28.524,-55.846 28.524,-56.797 28.504,-56.797 28.504,-56.875 28.485,-56.875 28.485,-56.914 28.466,-56.914 28.466,-56.933 28.446,-56.933 28.446,-56.952 28.427,-56.952 28.427,-56.991 28.407,-56.991 28.407,-57.011 28.369,-57.011 28.369,-57.03 28.349,-57.03 28.349,-57.049 28.31,-57.049 28.31,-57.069 28.291,-57.069 28.291,-57.088 28.252,-57.088 28.252,-57.108 28.194,-57.108 28.194,-57.127 28.116,-57.127 28.116,-57.146 28,-57.146 28,-57.166 27.787,-57.166 27.787,-57.146 27.495,-57.146 27.495,-57.127 27.476,-57.127 27.476,-55.439 27.495,-55.439 27.495,-55.42 28.039,-55.42 hole: 28.019,-55.711 27.806,-55.711 27.806,-56.215 27.787,-56.215 27.787,-56.681 27.787,-56.7 27.787,-56.817 27.806,-56.817 27.806,-56.855 27.922,-56.855 27.922,-56.836 28.058,-56.836 28.058,-56.817 28.116,-56.817 28.116,-56.797 28.136,-56.797 28.136,-56.758 28.155,-56.758 28.155,-56.7 28.175,-56.7 28.175,-55.846 28.155,-55.846 28.155,-55.808 28.136,-55.808 28.136,-55.769 28.116,-55.769 28.116,-55.749 28.078,-55.749 28.078,-55.73 28.019,-55.73
  region: 335 vertices and 0 holes, not listed, extent 27.166,-54.12 29.513,-51.597
  region: 275 vertices and 5 holes, not listed, extent 24.566,-53.499 26.875,-50.22

## Silkscreen, mask and mechanical layers (free items; w line width, h text height)
Mechanical 1:
  lines w0.254: -0.889,-59.753 -0.889,-2.159 cw(c1.905,-2.159) 1.905,0.635 93.98,0.635 cw(c93.98,-2.286) 96.901,-2.286 96.901,-58.928 cw(c93.916,-58.991) 93.98,-61.976 1.206,-61.976 ; -0.889,-59.69 ccw(c1.27,-59.817) 1.143,-61.976 ; 38.946,-41.994 38.946,-16.994 ; 38.981,-41.994 13.946,-41.994 13.946,-16.994 38.981,-16.994 ; 55.471,-41.994 55.471,-16.994 80.471,-16.994 80.471,-41.994 55.471,-41.994